# Altium PCB greento_PCB.PcbDoc
Units mm, origin at the board's own origin, x right, y up, seen from the top; angles counter-clockwise.
Board outline 152.49 x 82.5 mm, 2 copper layers (Top Layer, Bottom Layer), stack 1.671 mm thick; 45 components, 35 nets, 143 pads, 0 vias.
Unrouted connection lines stored in the file: 98.
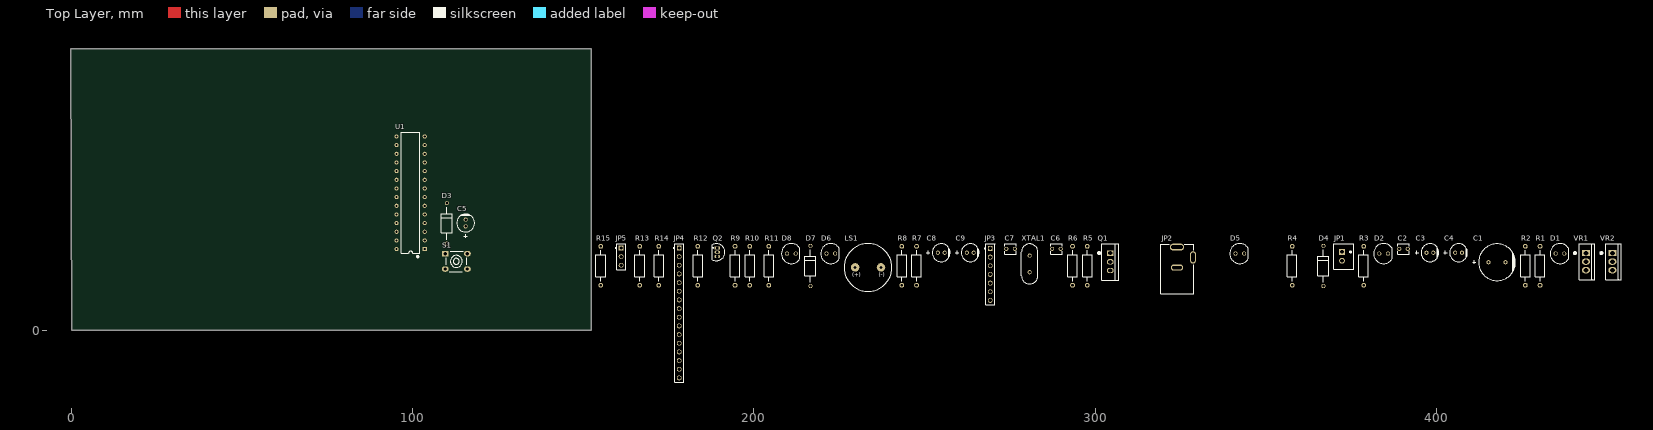
[diagram p0: Top Layer view]
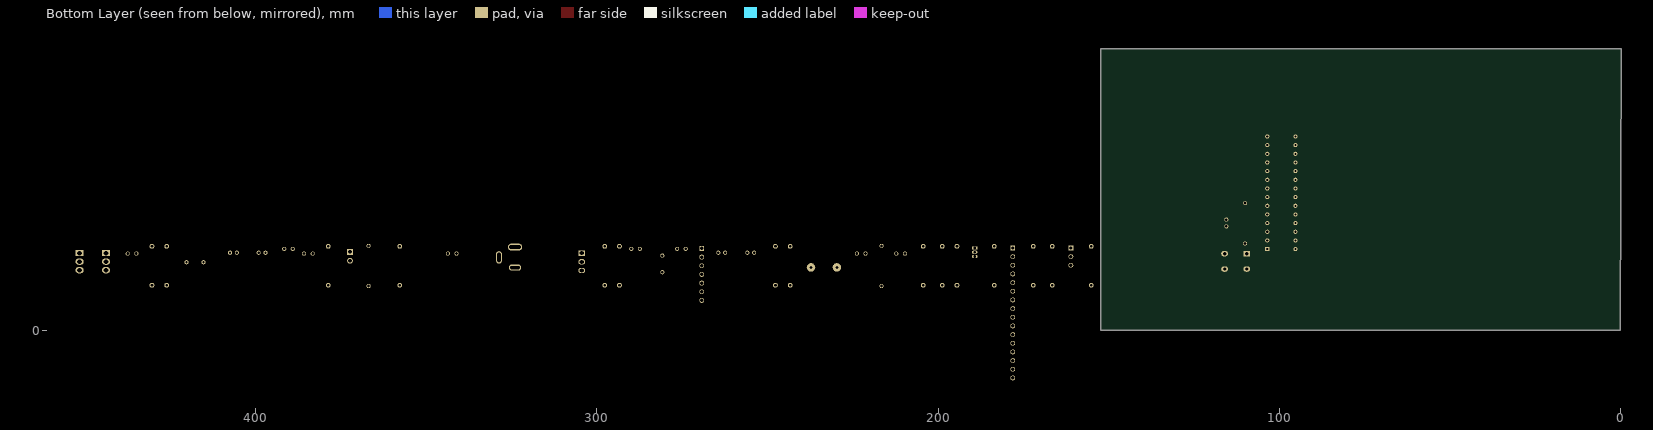
[diagram p1: Bottom Layer view, seen from below]

## Layer stack, top to bottom
Top Solder: solder mask 0.0102, Solder Resist, Dk 3.5
Top Layer: signal copper 0.0356
Dielectric 1: dielectric 1.6, FR-4, Dk 4.8
Bottom Layer: signal copper 0.0356
Bottom Solder: solder mask 0.0102, Solder Resist, Dk 3.5

## Board outline
0,0 152.3,0 152.3,82.5 -0.192,82.5

## Design rules (kind name [scope] priority, off if disabled: settings)
Clearance [All] p1: gap=0.3 ignorepadtopadclearanceinfootprint=FALSE
PolygonConnect [All] p1: connectstyle=Relief reliefconductorwidth=0.254 reliefentries=4 polygonreliefangle="90 Angle" airgapwidth=0.254
RoutingVias [All] p1: holewidth=0.3 width=0.6 viastyle="Through Hole" minholewidth=0.3 minwidth=0.6 maxholewidth=0.3 maxwidth=0.6
SilkToSolderMaskClearance [IsPad] p1: minsilkscreentomaskgap=0.1 clearancetoexposedcopper=TRUE
SolderMaskExpansion [All] p1: expansion=0.102 istentingtop=FALSE
Width [All] p1: maxlimit=1 minlimit=0.3 preferedwidth=0.5
29 further rules are at their usual default settings.

## Components (designator, comment, footprint, x,y, rotation, side; value= is the part's Value field where it differs from the comment)
C1 "CAP ALUM 10UF 20% 450V RADIAL" "CAP ALUM 10UF 20% 450V RADIAL" 415.317,19.984 r0 top
C2 "CAP CER 0.33UF 50V X7R RADIAL" "CAP CER 0.33UF 50V X7R RADIAL" 389.155,23.921 r0 top
C3 "CAP ALUM 0.1UF 20% 50V RADIAL" "CAP ALUM 0.1UF 20% 50V RADIAL" 397.156,22.778 r0 top
C4 "CAP ALUM 1UF 20% 100V RADIAL" "CAP ALUM 1UF 20% 100V RADIAL" 405.538,22.778 r0 top
C5 "CAP ALUM 0.1UF 20% 50V RADIAL" "CAP ALUM 0.1UF 20% 50V RADIAL" 115.5,30.5 r90 top
C6 "CAP CER 22PF 200V NP0 RADIAL" "CAP CER 22PF 200V NP0 RADIAL" 287.428,23.921 r0 top
C7 "CAP CER 22PF 200V NP0 RADIAL" "CAP CER 22PF 200V NP0 RADIAL" 273.966,23.921 r0 top
C8 "CAP ALUM 0.1UF 20% 50V RADIAL" "CAP ALUM 0.1UF 20% 50V RADIAL" 253.9,22.778 r0 top
C9 "CAP ALUM 0.1UF 20% 50V RADIAL" "CAP ALUM 0.1UF 20% 50V RADIAL" 262.409,22.778 r0 top
D1 "LED GREEN CLEAR T-1 3/4 T/H" "LED GREEN CLEAR T-1 3/4 T/H" 435.002,22.524 r0 top
D2 "LED GREEN CLEAR T-1 3/4 T/H" "LED GREEN CLEAR T-1 3/4 T/H" 383.313,22.524 r0 top
D3 "DIODE GEN PURP 50V 1A DO41" "Diode 1N001" 110,25.5 r90 top
D4 "DIODE GEN PURP 50V 1A DO41" "Diode 1N001" 366.93,12.999 r90 top
D5 "LED GREEN CLEAR T-1 3/4 T/H" "LED GREEN CLEAR T-1 3/4 T/H" 341.149,22.524 r0 top
D6 "LED GREEN CLEAR T-1 3/4 T/H" "LED GREEN CLEAR T-1 3/4 T/H" 221.261,22.524 r0 top
D7 "DIODE GEN PURP 50V 1A DO41" "Diode 1N001" 216.562,12.999 r90 top
D8 "LED RED DIFFUSED T-1 3/4 T/H" "RED GREEN CLEAR T-1 3/4 T/H" 209.704,22.524 r0 top
JP1 "CONN HEADER VERT 2POS 2.5MM" "CONN HEADER VERT 2POS 2.5MM" 372.391,23.032 r0 top
JP2 "PJ-002A" "CONN PWR JACK 2X5.5MM SOLDER" 324.004,24.429 r90 top
JP3 "CONN HEADER VERT 07POS 2.54MM" "HEADER MALE 7 PIN" 269.267,24.048 r0 top
JP4 "CONN HEADER VERT 16POS 2.54MM" "header male 16 pin" 178.081,24.175 r0 top
JP5 "CONN HEADER VERT 03POS 2.54MM" "HEADER MALE 3 PIN" 161.063,24.175 r0 top
LS1 "BUZZER PIEZO 5V 13.9MM TH" "BUZZER PIEZO 5V 13.9MM TH" 229.643,18.46 r0 top
Q1 "MOSFET N-CH 100V 33A TO220AB" IRF540NPBF 304.446,22.651 r0 top
Q2 "TRANS NPN 45V 0.1A TO92-3" BC547B 189.257,24.175 r0 top
R1 "RES 330 OHM 5% 1/2W AXIAL" "RES 330 OHM 5% 1/2W AXIAL" 430.43,13.253 r90 top
R2 "RES 10K OHM 5% 1/4W AXIAL" "RES 10K OHM 5% 1/4W AXIAL" 426.112,13.253 r90 top
R3 "RES 10K OHM 5% 1/4W AXIAL" "RES 10K OHM 5% 1/4W AXIAL" 378.741,13.253 r90 top
R4 "RES 10K OHM 5% 1/4W AXIAL" "RES 10K OHM 5% 1/4W AXIAL" 357.786,13.253 r90 top
R5 "RES 1K OHM 5% 1/4W AXIAL" "RES 1K OHM 5% 1/4W AXIAL" 297.715,13.253 r90 top
R6 "RES 10K OHM 5% 1/4W AXIAL" "RES 10K OHM 5% 1/4W AXIAL" 293.397,13.253 r90 top
R7 "RES 330 OHM 5% 1/2W AXIAL" "RES 330 OHM 5% 1/2W AXIAL" 247.677,13.253 r90 top
R8 "RES 330 OHM 5% 1/2W AXIAL" "RES 330 OHM 5% 1/2W AXIAL" 243.359,13.253 r90 top
R9 "RES 10K OHM 5% 1/4W AXIAL" "RES 10K OHM 5% 1/4W AXIAL" 194.464,13.253 r90 top
R10 "RES 10K OHM 5% 1/4W AXIAL" "RES 10K OHM 5% 1/4W AXIAL" 198.782,13.253 r90 top
R11 "RES 10K OHM 5% 1/4W AXIAL" "RES 10K OHM 5% 1/4W AXIAL" 204.37,13.253 r90 top
R12 "RES 1K OHM 5% 1/4W AXIAL" "RES 1K OHM 5% 1/4W AXIAL" 183.542,13.253 r90 top
R13 "RES 10K OHM 5% 1/4W AXIAL" "RES 10K OHM 5% 1/4W AXIAL" 166.524,13.253 r90 top
R14 "RES 330 OHM 5% 1/2W AXIAL" "RES 330 OHM 5% 1/2W AXIAL" 172.112,13.253 r90 top
R15 "RES 10K OHM 5% 1/4W AXIAL" "RES 10K OHM 5% 1/4W AXIAL" 155.094,13.253 r90 top
S1 "SWITCH TACTILE SPST-NO 0.05A 12V" "Tacktile switch" 109.5,22.5 r0 top
U1 "AVR series Microcontroller IC 8-Bit 20MHz 32KB (16K x 16) FLASH 28-PDIP" ATMEGA328P 103.5,23.84 r180 top
VR1 "LM7805CT" lm7805 443.892,22.651 r0 top
VR2 "LM7805CT" lm7805 451.639,22.651 r0 top
XTAL1 "CRYSTAL 16.0000MHZ 20PF TH" "CRYSTAL 16.0000MHZ 20PF TH" 280.824,17.063 r90 top

## Footprints (in the part's own frame and the unit in brackets; to place one, negate y for a bottom-side part, rotate by r counter-clockwise, add the part's x,y. Pads: shape width x height; smd on the part's side, far side on the other; paste and mask are expansions set on the pad)
ATMEGA328P [mm]
  rect 1.2x1.2 hole 0.6: 1(0,0)
  round 1.2 hole 0.6: 2(0,-2.54) 3(0,-5.08) 4(0,-7.62) 5(0,-10.16) 6(0,-12.7) 7(0,-15.24) 8(0,-17.78) 9(0,-20.32) 10(0,-22.86) 11(0,-25.4) 12(0,-27.94) 13(0,-30.48) 14(0,-33.02) 15(8.255,-33.02) 16(8.255,-30.48) 17(8.255,-27.94) 18(8.255,-25.4) 19(8.255,-22.86) 20(8.255,-20.32) 21(8.255,-17.78) 22(8.255,-15.24) 23(8.255,-12.7) 24(8.255,-10.16) 25(8.255,-7.62) 26(8.255,-5.08) 27(8.255,-2.54) 28(8.255,0)
  silkscreen extent 1.43,-34.29 6.82,2.48, body extent 0.2,-33.9 8.1,0.78, height 4.08
BC547B [mm]
  rect 1.6x0.9 hole 0.8: 1(0,0)
  oval 1.6x0.9 hole 0.8: 2(0,-1.25) 3(0,-2.5)
  silkscreen extent -1.53,-3.7 2.25,1.2, body extent -1.42,-3.6 2.2,1.15, height 5.43
"BUZZER PIEZO 5V 13.9MM TH" [mm]
  round 2.5 hole 0.9: 1(0,0) 2(7.6,0)
  silkscreen extent -3.2,-7 10.8,7, body extent -3.15,-6.95 10.75,6.95, height 7.6
"CAP ALUM 0.1UF 20% 50V RADIAL" [mm]
  round 1.2 hole 0.7: 1(0,0) 2(2,0)
  silkscreen extent -3.34,-2.62 3.62,2.62, body extent -1.59,-2.55 3.62,2.62, height 12.61
"CAP ALUM 1UF 20% 100V RADIAL" [mm]
  round 1.2 hole 0.7: 1(0,0) 2(2,0)
  silkscreen extent -3.34,-2.62 3.62,2.62, body extent -1.59,-2.55 3.62,2.62, height 12.61
"CAP ALUM 10UF 20% 450V RADIAL" [mm]
  round 1.2 hole 0.7: 1(0,0) 2(5,0)
  silkscreen extent -4.68,-5.4 7.9,5.4, body extent -2.75,-5.25 7.77,5.25, height 22.11
"CAP CER 0.33UF 50V X7R RADIAL" [mm]
  round 1.2 hole 0.7: 1(0,0) 2(2.5,0)
  silkscreen extent -0.48,-1.55 2.98,1.55, body extent -0.29,-1.04 2.79,1.04, height 5.3
"CAP CER 22PF 200V NP0 RADIAL" [mm]
  round 1.2 hole 0.7: 1(0,0) 2(2.5,0)
  silkscreen extent -0.48,-1.55 2.98,1.55, body extent -0.29,-1.04 2.79,1.04, height 5.3
"CONN HEADER VERT 2POS 2.5MM" [mm]
  rect 1.7x1.7 hole 1.1: 1(0,0)
  round 1.7 hole 1.1: 2(0,-2.6)
  silkscreen extent -2.37,-5.05 3.47,2.42, body extent -2.33,-5 3.42,2.4, height 7.01
"CONN PWR JACK 2X5.5MM SOLDER" [mm]
  oval 2x4.2 hole 1 slot 3.4 at 90 deg: 1(0,0)
  oval 1.8x3.6 hole 0.9 slot 2.8 at 90 deg: 2(-6,0)
  oval 3.6x1.8 hole 0.9 slot 2.8 at 0 deg: 3(-3,-4.7)
  silkscreen extent -13.7,-4.97 0.85,4.7, body extent -13.7,-4.83 0.7,4.57, height 11.1
"CRYSTAL 16.0000MHZ 20PF TH" [mm]
  round 1.2 hole 0.7: 1(0,0) 2(4.88,0)
  silkscreen extent -3.42,-2.4 8.3,2.4, body extent -2.99,-2.25 7.87,2.25, height 3.69
"Diode 1N001" [mm]
  round 1.2 hole 0.9: A(0,0) K(11.8,0)
  silkscreen extent 1.13,-1.6 10.68,1.6, body extent -0.4,-1.48 12.29,1.48, height 3.4
"HEADER MALE 3 PIN" [mm]
  rect 1.4x1.4 hole 1: 1(0,0)
  round 1.4 hole 1: 2(0,-2.54) 3(0,-5.08)
  silkscreen extent -1.77,-6.43 1.3,1.28, body extent -1.27,-6.37 1.27,1.25, height 8.35
"HEADER MALE 7 PIN" [mm]
  rect 1.4x1.4 hole 1: 1(0,0)
  round 1.4 hole 1: 2(0,-2.54) 3(0,-5.08) 4(0,-7.62) 5(0,-10.16) 6(0,-12.7) 7(0,-15.24)
  silkscreen extent -1.77,-16.58 1.3,1.33, body extent -1.27,-16.53 1.27,1.25, height 8.49
"header male 16 pin" [mm]
  rect 1.4x1.4 hole 1: 1(0,0)
  round 1.4 hole 1: 2(0,-2.54) 3(0,-5.08) 4(0,-7.62) 5(0,-10.16) 6(0,-12.7) 7(0,-15.24) 8(0,-17.78) 9(0,-20.32) 10(0,-22.86) 11(0,-25.4) 12(0,-27.94) 13(0,-30.48) 14(0,-33.02) 15(0,-35.56) 16(0,-38.1)
  silkscreen extent -1.77,-39.4 1.28,1.28, body extent -1.27,-39.39 1.27,1.25, height 8.49
IRF540NPBF [mm]
  rect 2x1.6 hole 1.2: 1(0,0)
  oval 2x1.6 hole 1.2: 2(0,-2.54) 3(0,-5.08)
  silkscreen extent -3.55,-7.98 2.47,2.8, body extent -2.32,-7.85 2.38,2.69, height 15.75
"LED GREEN CLEAR T-1 3/4 T/H" [mm]
  round 1.2 hole 0.8: A(0,0) K(2.54,0)
  silkscreen extent -1.65,-2.92 3.77,2.92, body extent -1.66,-2.93 3.77,2.93, height 8.61
lm7805 [mm]
  rect 2.4x1.8 hole 1.4: 1(0,0)
  oval 2.4x1.8 hole 1.4: 2(0,-2.5) 3(0,-5)
  silkscreen extent -3.55,-7.75 2.52,2.8, body extent -1.78,-7.61 2.4,2.67, height 20.75
"RED GREEN CLEAR T-1 3/4 T/H" [mm]
  round 1.2 hole 0.8: A(0,0) K(2.54,0)
  silkscreen extent -1.65,-2.92 3.77,2.92, body extent -1.66,-2.93 3.77,2.93, height 8.61
"RES 1K OHM 5% 1/4W AXIAL" [mm]
  round 1.4 hole 0.8: 1(0,0) 2(11.4,0)
  silkscreen extent 1.2,-1.4 10.2,1.4, body extent -0.32,-1.31 11.75,1.31, height 2.61
"RES 10K OHM 5% 1/4W AXIAL" [mm]
  round 1.4 hole 0.8: 1(0,0) 2(11.4,0)
  silkscreen extent 1.2,-1.4 10.2,1.4, body extent -0.32,-1.31 11.75,1.31, height 2.61
"RES 330 OHM 5% 1/2W AXIAL" [mm]
  round 1.4 hole 0.8: 1(0,0) 2(11.4,0)
  silkscreen extent 1.2,-1.4 10.2,1.4, body extent -0.32,-1.31 11.75,1.31, height 2.61
"Tacktile switch" [mm]
  rect 2x1.6 hole 1: 1(0,0)
  oval 2x1.6 hole 1: 2(6.5,0) 3(0,-4.5) 4(6.5,-4.5)
  silkscreen extent 0.25,-5.25 6.25,0.75, body extent -0.7,-5.25 7.2,0.75, height 9.51

## Part data
C1: library part 450BXC10MEFC10X20, "BXC Series 450 V 10 µF 10x20mm Aluminum Electrolytic Capacitor", Capacitance=10uF, Case/Package=Radial, Dielectric Material=Aluminium, Manufacturer=Rubycon, Max Operating Temperature=105°C, Min Operating Temperature=-25°C, Package Quantity=1000, Ripple Current=99mA, Supplier Part Number 1="10 uF", Tolerance=20%, Voltage=450V, Category="Aluminum Electrolytic Capacitors", ComponentLink1Description=https://datasheet.ciiva.com/11780/0900766b80f2a138-11780805.pdf?src-supplier=RSComponents, ComponentLink1URL=https://datasheet.ciiva.com/11780/0900766b80f2a138-11780805.pdf?src-supplier=RSComponents, ComponentLink2Description=https://datasheet.ciiva.com/1456/610966-1456385.pdf?src-supplier=Element14, ComponentLink2URL=https://datasheet.ciiva.com/1456/610966-1456385.pdf?src-supplier=Element14, Diameter=10mm, Height=20mm, Height - Seated (Max)=0.866inch, Lead Free="Lead Free", Lead Pitch=5mm, Life (Hours)=10000Hour, Manufacturer Part Number=450BXC10MEFC10X20, Mount="Through Hole", Packaging=Bulk, Pricing 1="1=0.77000, 10=0.54700, 50=0.41380, 100=0.36030, 500=0.26692, 1000=0.22688, 2500=0.21353, 5000=0.20019 (USD)", Radiation Hardening=No, REACH SVHC=Unknown, RoHS=Yes, RoHS Compliant=Yes, Series=BXC, Stock 1=68178, Supplier 1=Digi-Key, Termination=Radial, Voltage Rating=450V, Voltage Rating (DC)=450V
C2: library part FK24X7R1H334K, "Cap Ceramic 0.33uF 50V X7R 10% Radial 5mm 125C Bulk", Capacitance=330nF, Case/Package=Radial, Dielectric=X7R, Manufacturer=TDK, Max Operating Temperature=125°C, Min Operating Temperature=-55°C, Package Quantity=500, Supplier Part Number 1=0.33uF, Tolerance=10%, Voltage Rating=50V, Category="Ceramic Capacitors", ComponentLink1Description=https://datasheet.ciiva.com/5388/tdk-lowvoltageleadmlcc-commercial-general-en-347111-5388967.pdf?src-supplier=Mouser, ComponentLink1URL=https://datasheet.ciiva.com/5388/tdk-lowvoltageleadmlcc-commercial-general-en-347111-5388967.pdf?src-supplier=Mouser, ComponentLink2Description=https://datasheet.ciiva.com/142/leadmlcc-commercial-general-en-142555.pdf?src-supplier=Digi-Key, ComponentLink2URL=https://datasheet.ciiva.com/142/leadmlcc-commercial-general-en-142555.pdf?src-supplier=Digi-Key, ComponentLink3Description=https://datasheet.ciiva.com/11590/e4941-fk-11590557.pdf?src-supplier=Avnet, ComponentLink3URL=https://datasheet.ciiva.com/11590/e4941-fk-11590557.pdf?src-supplier=Avnet, Height=2.5mm, Height - Seated (Max)=0.217inch, Lead Diameter=0.5mm, Lead Free="Lead Free", Lead Pitch=5mm, Lead/Base Style=Kinked, Length=0.217inch, Manufacturer Part Number=FK24X7R1H334K, Mount="Through Hole", Packaging=Bulk, Pricing 1="1=0.35000, 10=0.24500, 50=0.17140, 100=0.14680, 500=0.11014, 1000=0.09300, 2500=0.08811, 5000=0.08322 (USD)", Radiation Hardening=No, RoHS=Yes, RoHS Compliant=Yes, Series=FK, Stock 1=6787, Supplier 1=Digi-Key, Termination=Radial, Voltage Rating (DC)=50V, Width=4.5mm
C3 C5 C8 C9: library part UVZ1H0R1MDD1TD, "NICHICON         UVZ1H0R1MDD1TD             ALUMINUM ELECTROLYTIC CAPACITOR, 0.1UF, 50V, 20%, RADIAL", Capacitance=100nF, Case/Package=Radial, Dielectric Material=Aluminium, Manufacturer=Nichicon, Max Operating Temperature=105°C, Min Operating Temperature=-55°C, Package Quantity=2000, Ripple Current=1.3mA, Supplier Part Number 1=0.1uF, Tolerance=20%, Voltage Rating=50V, Category="Aluminum Electrolytic Capacitors", ComponentLink1Description=https://datasheet.ciiva.com/7336/e-vz-7336149.pdf?src-supplier=Newark, ComponentLink1URL=https://datasheet.ciiva.com/7336/e-vz-7336149.pdf?src-supplier=Newark, ComponentLink2Description=https://datasheet.ciiva.com/29550/e-vz-29550229.pdf?src-supplier=Digi-Key, ComponentLink2URL=https://datasheet.ciiva.com/29550/e-vz-29550229.pdf?src-supplier=Digi-Key, ComponentLink3Description=https://datasheet.ciiva.com/22749/1909357-22749707.pdf?src-supplier=Element14, ComponentLink3URL=https://datasheet.ciiva.com/22749/1909357-22749707.pdf?src-supplier=Element14, ComponentLink4Description=https://datasheet.ciiva.com/7781/e-vz-7781773.pdf?src-supplier=Element14, ComponentLink4URL=https://datasheet.ciiva.com/7781/e-vz-7781773.pdf?src-supplier=Element14, Diameter=5mm, Height=11mm, Height - Seated (Max)=0.492inch, Lead Pitch=0.079inch, Lead/Base Style=Straight, Life (Hours)=1000Hour, Manufacturer Part Number=UVZ1H0R1MDD1TD, Mount="Through Hole", Number of Pins=2, Packaging="Tape and Reel", Pricing 1="1=0.31000, 10=0.21400, 50=0.14260, 100=0.12120, 500=0.08556, 1000=0.07486 (USD)", REACH SVHC="No SVHC", RoHS=Yes, RoHS Compliant=Yes, Series=VZ, Stock 1=9888, Supplier 1=Digi-Key, Termination=Radial, Voltage Rating (DC)=50V
C4: library part UVR2A010MDD1TD, "Cap Aluminum 1uF 100V 20% (5 X 11mm) Radial 2.5mm 21mA 2000 hr 85°C Ammo Pack", Capacitance=1uF, Case/Package=Radial, Dielectric Material=Aluminium, Leakage Current=4uA, Manufacturer=Nichicon, Max Operating Temperature=85°C, Min Operating Temperature=-40°C, Package Quantity=2000, Ripple Current=21mA, Tolerance=20%, Voltage=100V, Category="Aluminum Electrolytic Capacitors", ComponentLink1Description=https://datasheet.ciiva.com/11688/e-vr-11688357.pdf?src-supplier=Avnet, ComponentLink1URL=https://datasheet.ciiva.com/11688/e-vr-11688357.pdf?src-supplier=Avnet, ComponentLink2Description=https://datasheet.ciiva.com/29550/e-vr-29550405.pdf?src-supplier=Digi-Key, ComponentLink2URL=https://datasheet.ciiva.com/29550/e-vr-29550405.pdf?src-supplier=Digi-Key, ComponentLink3Description=https://datasheet.ciiva.com/7907/e-vr-7907511.pdf?src-supplier=Element14, ComponentLink3URL=https://datasheet.ciiva.com/7907/e-vr-7907511.pdf?src-supplier=Element14, ComponentLink4Description=https://datasheet.ciiva.com/5330/e-vr-6088-5330601.pdf?src-supplier=Mouser, ComponentLink4URL=https://datasheet.ciiva.com/5330/e-vr-6088-5330601.pdf?src-supplier=Mouser, ComponentLink5Description=https://datasheet.ciiva.com/16392/e-vr-16392922.pdf?src-supplier=Future+Electronics, ComponentLink5URL=https://datasheet.ciiva.com/16392/e-vr-16392922.pdf?src-supplier=Future+Electronics, ComponentLink6Description=https://datasheet.ciiva.com/14599/70187464-14599886.pdf?src-supplier=Allied+Electronics, ComponentLink6URL=https://datasheet.ciiva.com/14599/70187464-14599886.pdf?src-supplier=Allied+Electronics, Construction=RADIAL, Diameter=5mm, Dissipation Factor=0.08%, Height=11mm, Height - Seated (Max)=0.492inch, Lead Diameter=0.5mm, Lead Free="Lead Free", Lead Pitch=2mm, Length=11mm, Life (Hours)=2000Hour, Manufacturer Part Number=UVR2A010MDD1TD, Mount="Through Hole,PCB", Number of Pins=2, Packaging="Tape and Reel", Pricing 1="1=0.30000, 10=0.20600, 50=0.13700, 100=0.11650, 500=0.08224, 1000=0.07197 (USD)", Radiation Hardening=No, REACH SVHC="No SVHC", RoHS=Yes, RoHS Compliant=Yes, Series=VR, Stock 1=11511, Supplier 1=Digi-Key, Supplier Part Number 1=1uF, Termination=Radial, Voltage Rating=100V, Voltage Rating (DC)=100V
C6 C7: library part C317C220J2G5TA, "Cap Ceramic 22pF 200V C0G 5% Radial 5.08mm 125°C Extreme Low ESR Bulk", Capacitance=22pF, Case/Package=Radial, Dielectric=C0G, Dielectric Material=Ceramic, Manufacturer=KEMET, Max Operating Temperature=125°C, Min Operating Temperature=-55°C, Package Quantity=500, Temperature Coefficient=30ppm/°C, Tolerance=5%, Voltage=200V, Category="Ceramic Capacitors", ComponentLink1Description=https://datasheet.ciiva.com/14588/70095037-14588379.pdf?src-supplier=Allied+Electronics, ComponentLink1URL=https://datasheet.ciiva.com/14588/70095037-14588379.pdf?src-supplier=Allied+Electronics, ComponentLink2Description=https://datasheet.ciiva.com/6178/f3101-goldmax-6178014.pdf?src-supplier=Farnell, ComponentLink2URL=https://datasheet.ciiva.com/6178/f3101-goldmax-6178014.pdf?src-supplier=Farnell, Construction=RADIAL, Depth=2.54mm, Dissipation Factor=0.1%, Height=2.54mm, Height - Seated (Max)=0.23inch, Lead Diameter=0.51mm, Lead Free="Lead Free", Lead Length=7mm, Lead Pitch=5.08mm, Lead/Base Style="Formed Leads", Length=3.81mm, Manufacturer Part Number=C317C220J2G5TA, Mount="Through Hole,PCB", Number of Pins=2, Packaging=Bulk, Pricing 1="1=0.20000, 10=0.13900, 50=0.08320, 100=0.07020, 500=0.04804, 1000=0.04250, 2500=0.04066, 5000=0.03696 (USD)", Radiation Hardening=No, REACH SVHC="No SVHC", RoHS=Yes, RoHS Compliant=Yes, Series="Golden Max™", Stock 1=33492, Supplier 1=Digi-Key, Supplier Part Number 1=22pF, Termination=Radial, Voltage Rating=200V, Voltage Rating (DC)=200V, Width=3.81mm
D1 D2 D5 D6: library part LTL-307GE, "Green 5 mm T-13/4 40° Diffused 29 mcd 2.1 V LED Through Hole", Case/Package=Radial, Color=Green, Forward Current=30mA, Forward Voltage=2.1V, Manufacturer="Vishay Lite-On", Max Operating Temperature=100°C, Min Operating Temperature=-55°C, Package Quantity=1000, Power Dissipation=100mW, Reverse Voltage=5V, Supplier Part Number 1=GREEN, Test Current=10mA, Category=LEDs, ComponentLink1Description=https://datasheet.ciiva.com/2112/ltl-307ge-2112299.pdf?src-supplier=Digi-Key, ComponentLink1URL=https://datasheet.ciiva.com/2112/ltl-307ge-2112299.pdf?src-supplier=Digi-Key, ComponentLink2Description=https://datasheet.ciiva.com/4692/100-307ge-41558-4692669.pdf?src-supplier=Mouser, ComponentLink2URL=https://datasheet.ciiva.com/4692/100-307ge-41558-4692669.pdf?src-supplier=Mouser, ComponentLink3Description=https://datasheet.ciiva.com/16216/ltl-307ge-16216217.pdf?src-supplier=Future+Electronics, ComponentLink3URL=https://datasheet.ciiva.com/16216/ltl-307ge-16216217.pdf?src-supplier=Future+Electronics, ComponentLink4Description=https://datasheet.ciiva.com/15118/getdatasheetpartid-214534-15118092.pdf?src-supplier=Verical, ComponentLink4URL=https://datasheet.ciiva.com/15118/getdatasheetpartid-214534-15118092.pdf?src-supplier=Verical, ComponentLink5Description=https://datasheet.ciiva.com/19482/790217-19482316.pdf?src-supplier=Jameco, ComponentLink5URL=https://datasheet.ciiva.com/19482/790217-19482316.pdf?src-supplier=Jameco, Depth=5.85mm, Diameter=5mm, Dominant Wavelength=569nm, Height=8.6mm, Illumination Color=Green, Lead Free="Lead Free", Length=5.85mm, Lens Color=Green, Lens Style=Dome,Diffused,Colored,Circular, Lens Transparency=Clear, Luminous Intensity=60mcd, Manufacturer Part Number=LTL-307GE, Mount="Through Hole", Number of Elements=1, Number of LEDs=1, Number of Pins=2, Packaging=Bulk, Pricing 1="1=0.36000, 10=0.19300, 100=0.08970, 500=0.08280, 1000=0.06486, 2000=0.06348, 5000=0.05520, 10000=0.04968, 25000=0.04416 (USD)", Radiation Hardening=No, RoHS=Yes, RoHS Compliant=Yes, Series=-, Stock 1=33535, Supplier 1=Digi-Key, Viewing Angle=40°, Wavelength=565nm
D3 D4 D7: library part 1N4001G, "Diode Switching 50V 1A 2-Pin DO-41 Bag", Average Rectified Current=1A, Case/Package=DO-41, Forward Voltage=1.1V, Manufacturer="ON Semiconductor", Max Forward Surge Current (Ifsm)=30A, Max Operating Temperature=175°C, Max Repetitive Reverse Voltage (Vrrm)=50V, Max Reverse Current=10uA, Min Operating Temperature=-65°C, Package Quantity=1000, Supplier Part Number 1=1N4001, Category="Rectifier Diodes", ComponentLink1Description=https://datasheet.ciiva.com/30479/0900766b811a6370-30479403.pdf?src-supplier=RSComponents, ComponentLink1URL=https://datasheet.ciiva.com/30479/0900766b811a6370-30479403.pdf?src-supplier=RSComponents, ComponentLink2Description=https://datasheet.ciiva.com/3304/1n4001-d-3304181.pdf?src-supplier=Avnet, ComponentLink2URL=https://datasheet.ciiva.com/3304/1n4001-d-3304181.pdf?src-supplier=Avnet, ComponentLink3Description=https://datasheet.ciiva.com/916/1n4001-d-916308.pdf?src-supplier=Digi-Key, ComponentLink3URL=https://datasheet.ciiva.com/916/1n4001-d-916308.pdf?src-supplier=Digi-Key, Contact Plating=Tin,Matte, Current Rating=1A, Diameter=2.7mm, Element Configuration=Single, Forward Current=1A, Halogen Free="Halogen Free", Height=5.2mm, Lead Free="Lead Free", Length=0.204inch, Manufacturer Part Number=1N4001G, Max Reverse Voltage (DC)=50V, Max Surge Current=30A, Number of Pins=2, Output Current=1A, Packaging=Bulk, Peak Non-Repetitive Surge Current=30A, Polarity=Standard, Pricing 1="1=0.32000, 10=0.26400, 100=0.14020, 500=0.09222, 1000=0.06271, 2000=0.05656, 5000=0.04918, 10000=0.04181, 50000=0.04060 (USD)", Radiation Hardening=No, REACH SVHC="No SVHC", Reverse Voltage=50V, RoHS=Yes, RoHS Compliant=Yes, Series=-, Supplier 1=Digi-Key, Voltage Rating (DC)=50V, Weight=0.01lb, Width=0.25inch
D8: library part LTL-307P, "Red 5 mm 50° Tinted Diffused 5.6 mcd 2.1 V LED Through Hole", Case/Package=Radial, Color=Red, Forward Current=15mA, Forward Voltage=2.1V, Manufacturer="Vishay Lite-On", Max Operating Temperature=100°C, Max Power Dissipation=40mW, Min Operating Temperature=-55°C, Operating Wavelength-Nom=657nm, Package Quantity=1000, Reverse Voltage=5V, Supplier Part Number 1=RED, Test Current=10mA, Category=LEDs, ComponentLink1Description=https://datasheet.ciiva.com/2112/ltl-307p-2112293.pdf?src-supplier=Digi-Key, ComponentLink1URL=https://datasheet.ciiva.com/2112/ltl-307p-2112293.pdf?src-supplier=Digi-Key, ComponentLink2Description=https://datasheet.ciiva.com/4692/100-307p-13516-4692492.pdf?src-supplier=Mouser, ComponentLink2URL=https://datasheet.ciiva.com/4692/100-307p-13516-4692492.pdf?src-supplier=Mouser, ComponentLink3Description=https://datasheet.ciiva.com/15117/getdatasheetpartid-187741-15117983.pdf?src-supplier=Verical, ComponentLink3URL=https://datasheet.ciiva.com/15117/getdatasheetpartid-187741-15117983.pdf?src-supplier=Verical, ComponentLink4Description=https://datasheet.ciiva.com/16331/lite-onltl-307p-16331293.pdf?src-supplier=Future+Electronics, ComponentLink4URL=https://datasheet.ciiva.com/16331/lite-onltl-307p-16331293.pdf?src-supplier=Future+Electronics, Depth=5.85mm, Diameter=5mm, Dominant Wavelength=657nm, Height=8.6mm, Illumination Color=Red, Lead Free="Lead Free", Length=5.85mm, Lens Color=Red, Lens Style=Dome,Diffused,Colored,Circular,Tinted, Lens Transparency=Diffused, Luminous Intensity=5.6mcd, Manufacturer Part Number=LTL-307P, Mount="Through Hole", Number of Elements=1, Number of LEDs=1, Number of Pins=2, Packaging=Bulk, Power Dissipation=40mW, Pricing 1="1=0.36000, 10=0.19300, 100=0.08970, 500=0.08280, 1000=0.06486, 2000=0.06348, 5000=0.05520, 10000=0.04968, 25000=0.04416 (USD)", Radiation Hardening=No, RoHS=Yes, RoHS Compliant=Yes, Series=-, Stock 1=11954, Supplier 1=Digi-Key, Viewing Angle=50°, Wavelength=657nm, Width=5.85mm
JP1: library part B2B-XH-A(LF)(SN), "Conn Shrouded Header (4 Sides) HDR 2 POS 2.5mm Solder ST Thru-Hole Box", Manufacturer=JST, Supplier Part Number 1=JST-2PIN, Category="Headers and Wire Housings", ComponentLink1Description=https://datasheet.ciiva.com/11746/0900766b8082653e-11746979.pdf?src-supplier=RSComponents, ComponentLink1URL=https://datasheet.ciiva.com/11746/0900766b8082653e-11746979.pdf?src-supplier=RSComponents, ComponentLink2Description=https://datasheet.ciiva.com/26894/getdatasheetpartid-640357-26894434.pdf?src-supplier=Verical, ComponentLink2URL=https://datasheet.ciiva.com/26894/getdatasheetpartid-640357-26894434.pdf?src-supplier=Verical, ComponentLink3Description=https://datasheet.ciiva.com/26894/getdatasheetpartid-385291-26894760.pdf?src-supplier=Verical, ComponentLink3URL=https://datasheet.ciiva.com/26894/getdatasheetpartid-385291-26894760.pdf?src-supplier=Verical, ComponentLink4Description=https://datasheet.ciiva.com/8052/5448-8052024.pdf?src-supplier=Element14, ComponentLink4URL=https://datasheet.ciiva.com/8052/5448-8052024.pdf?src-supplier=Element14, Manufacturer Part Number=B2B-XH-A(LF)(SN), Pricing 1="1=0.15000, 10=0.11800, 100=0.08680, 500=0.07182, 1000=0.06284, 5000=0.05386, 10000=0.05237 (USD)", RoHS=Yes, Supplier 1=Digi-Key
JP2: "2.0 x 6.5 mm, 2.5 A, Horizontal, Through Hole, Dc Power Jack Connector", Color=Black, Current Rating=2.5A, Flammability Rating="UL94 V-0", Insulation Resistance=50MR, Manufacturer=CUI, Max Operating Temperature=85°C, Min Operating Temperature=-25°C, Package Quantity=500, Supplier Part Number 1="12V JACK", Voltage Rating=24V, Category=Connectors, ComponentLink1Description=http://www.mouser.com/ds/2/670/pj-002a-515880.pdf?src-supplier=Mouser, ComponentLink1URL=http://www.mouser.com/ds/2/670/pj-002a-515880.pdf?src-supplier=Mouser, ComponentLink2Description=http://www.cui.com/Product/Resource/FuturePDF/PJ-002A.pdf?src-supplier=Future+Electronics, ComponentLink2URL=http://www.cui.com/Product/Resource/FuturePDF/PJ-002A.pdf?src-supplier=Future+Electronics, ComponentLink3Description=https://www.cui.com/product/resource/digikeypdf/pj-002a.pdf?src-supplier=Digi-Key, ComponentLink3URL=https://www.cui.com/product/resource/digikeypdf/pj-002a.pdf?src-supplier=Digi-Key, Connector Type=Jack, Contact Gender=Male, Contact Material="Copper Alloy,Copper", Contact Plating=Tin,Nickel, Diameter=2.1mm, Gender=Male, Housing Color=Black, Housing Material=Thermoplastic, Lead Free="Lead Free", Manufacturer Part Number=PJ-002A, Mount="Through Hole", Number of Conductors=2, Orientation=Horizontal, Packaging=Bulk, RoHS=Yes, RoHS Compliant=Yes, Series=-, Shielding=Unshielded, Supplier 1=Digi-Key, Termination="Through Hole"
JP3: library part PRPC007SACN-RC, "07 Position Through-Hole Single Row Straight .100 Header", Color=Black, Manufacturer=Sullins, Manufacturer Part Number=PRPC040SACN-RC, Package Quantity=1, Supplier Part Number 1=HEADER-MALE-7PINS, Category=Connectors, ComponentLink1Description=https://datasheet.ciiva.com/741/xrxczzzsxxn-rc-st-11635-b-741925.pdf?src-supplier=Digi-Key, ComponentLink1URL=https://datasheet.ciiva.com/741/xrxczzzsxxn-rc-st-11635-b-741925.pdf?src-supplier=Digi-Key, Connector Type="Male Pin", Contact Mating Length=0.23inch, Contact Plating=Gold, Contact Type="Male Pin", Lead Free="Lead Free", Mount="Through Hole", Number of Positions=40, Number of Rows=1, Packaging=Bulk, Pitch=0.1inch, Pricing 1="1=0.90000, 10=0.80100, 100=0.65960, 500=0.52140, 1000=0.45370 (USD)", RoHS=Yes, RoHS Compliant=Yes, Stock 1=10402, Supplier 1=Digi-Key, Termination=Solder
JP4: library part PRPC016SACN-RC, "16 Position Through-Hole Single Row Straight .100 Header", Color=Black, Manufacturer=Sullins, Manufacturer Part Number=PRPC040SACN-RC, Package Quantity=1, Supplier Part Number 1=HEADER-MALE-16PINS, Category=Connectors, ComponentLink1Description=https://datasheet.ciiva.com/741/xrxczzzsxxn-rc-st-11635-b-741925.pdf?src-supplier=Digi-Key, ComponentLink1URL=https://datasheet.ciiva.com/741/xrxczzzsxxn-rc-st-11635-b-741925.pdf?src-supplier=Digi-Key, Connector Type="Male Pin", Contact Mating Length=0.23inch, Contact Plating=Gold, Contact Type="Male Pin", Lead Free="Lead Free", Mount="Through Hole", Number of Positions=40, Number of Rows=1, Packaging=Bulk, Pitch=0.1inch, Pricing 1="1=0.90000, 10=0.80100, 100=0.65960, 500=0.52140, 1000=0.45370 (USD)", RoHS=Yes, RoHS Compliant=Yes, Stock 1=10402, Supplier 1=Digi-Key, Termination=Solder
JP5: library part PRPC040SACN-RC, "03 Position Through-Hole Single Row Straight .100 Header", Color=Black, Manufacturer=Sullins, Package Quantity=1, Supplier Part Number 1=HEADER_MALE_3PINS, Category=Connectors, ComponentLink1Description=https://datasheet.ciiva.com/741/xrxczzzsxxn-rc-st-11635-b-741925.pdf?src-supplier=Digi-Key, ComponentLink1URL=https://datasheet.ciiva.com/741/xrxczzzsxxn-rc-st-11635-b-741925.pdf?src-supplier=Digi-Key, Connector Type="Male Pin", Contact Mating Length=0.23inch, Contact Plating=Gold, Contact Type="Male Pin", Lead Free="Lead Free", Manufacturer Part Number=PRPC040SACN-RC, Mount="Through Hole", Number of Positions=40, Number of Rows=1, Packaging=Bulk, Pitch=0.1inch, Pricing 1="1=0.90000, 10=0.80100, 100=0.65960, 500=0.52140, 1000=0.45370 (USD)", RoHS=Yes, RoHS Compliant=Yes, Stock 1=10402, Supplier 1=Digi-Key, Termination=Solder
LS1: library part CPI-137-83T, "13.9 mm, 5 Vdc, 83 dB, Through Hole, Driving Circuit, Piezo Audio Indicator Buzzer", Manufacturer=CUI, Supplier Part Number 1=BUZZER, Manufacturer Part Number=CPI-137-83T, RoHS=No, Supplier 1=Digi-Key
Q1: library part IRF540NPBF, "Mosfet, Power; N-ch; Vdss 100V; Rds(on) 44MILLIOHMS; Id 33A; TO-220AB; Pd 130W; -55DEG", Case/Package=TO-220AB, Continuous Drain Current (ID)=33A, Current Rating=27A, Drain to Source Breakdown Voltage=100V, Drain to Source Resistance=44mR, Drain-source On Resistance-Max=44MR, Gate to Source Voltage (Vgs)=20V, Input Capacitance=1.96nF, Manufacturer="International Rectifier", Max Operating Temperature=175°C, Max Power Dissipation=130W, Min Operating Temperature=-55°C, Package Quantity=50, Threshold Voltage=4V, Category=MOSFETs, ComponentLink1Description=https://datasheet.ciiva.com/7271/irf540n-7271923.pdf?src-supplier=Newark, ComponentLink1URL=https://datasheet.ciiva.com/7271/irf540n-7271923.pdf?src-supplier=Newark, Drain to Source Voltage (Vdss)=100V, Dual Supply Voltage=100V, Element Configuration=Single, Fall Time=35ns, Height=15.24mm, Lead Free="Lead Free", Lead Pitch=2.54mm, Length=10.54mm, Manufacturer Part Number=IRF540NPBF, Mount="Through Hole", Nominal Vgs=4V, Number of Elements=1, Number of Pins=3, On-State Resistance=44MR, Packaging=Rail/Tube, Polarization=N, Power Dissipation=130W, Radiation Hardening=No, Rds On Max=44mR, REACH SVHC="No SVHC", Recovery Time=170ns, Rise Time=35ns, RoHS=Yes, RoHS Compliant=Yes, Series=HEXFET®, Supplier 1=Digi-Key, Supplier Part Number 1=IRF540NPBF, Termination="Through Hole", Turn-Off Delay Time=39ns, Turn-On Delay Time=11ns, Voltage Rating (DC)=100V, Width=0.185inch
Q2: library part BC547B, "Trans GP BJT NPN 45V 0.1A 500mW Automotive 3-Pin TO-92 Ammo", Case/Package=TO-92, Collector Base Voltage (VCBO)=50V, Collector Emitter Breakdown Voltage=45V, Collector Emitter Saturation Voltage=300mV, Current Rating=100mA, Emitter Base Voltage (VEBO)=6V, Frequency=300MHz, Manufacturer="ON Semiconductor / Fairchild", Max Operating Temperature=150°C, Max Power Dissipation=500mW, Min Operating Temperature=-65°C, Package Quantity=2000, Supplier Part Number 1=BC547BFS, Voltage=40V, Category=BJTs, Collector Emitter Voltage (VCEO)=45V, ComponentLink1Description=https://datasheet.ciiva.com/17011/bc547-17011404.pdf?src-supplier=Future+Electronics, ComponentLink1URL=https://datasheet.ciiva.com/17011/bc547-17011404.pdf?src-supplier=Future+Electronics, ComponentLink2Description=https://datasheet.ciiva.com/985/bc546-547-548rev5-985523.pdf?src-supplier=Digi-Key, ComponentLink2URL=https://datasheet.ciiva.com/985/bc546-547-548rev5-985523.pdf?src-supplier=Digi-Key, ComponentLink3Description=https://datasheet.ciiva.com/972/bc546-972262.pdf?src-supplier=Digi-Key, ComponentLink3URL=https://datasheet.ciiva.com/972/bc546-972262.pdf?src-supplier=Digi-Key, ComponentLink4Description=https://datasheet.ciiva.com/1195/1868820-1195464.pdf?src-supplier=Element14, ComponentLink4URL=https://datasheet.ciiva.com/1195/1868820-1195464.pdf?src-supplier=Element14, ComponentLink5Description=https://datasheet.ciiva.com/11197/bc550-11197769.pdf?src-supplier=Avnet, ComponentLink5URL=https://datasheet.ciiva.com/11197/bc550-11197769.pdf?src-supplier=Avnet, Contact Plating=Copper,Tin,Silver, Element Configuration=Single, Gain Bandwidth Product=100MHz, Height=4.58mm, hFE Min=200, Lead Free="Lead Free", Length=4.58mm, Manufacturer Part Number=BC547B, Max Breakdown Voltage=45V, Max Collector Current=100mA, Max Frequency=300MHz, Mount="Through Hole", Number of Elements=1, Number of Pins=3, Packaging=Bulk, Polarity=NPN, Power Dissipation=500mW, Pricing 1="1=0.50000, 10=0.36900, 100=0.20890, 500=0.13832, 1000=0.10605, 2000=0.09222, 5000=0.08300, 10000=0.07613 (USD)", Radiation Hardening=No, REACH SVHC="No SVHC", RoHS=Yes, Stock 1=7180, Supplier 1=Digi-Key, Transition Frequency=300MHz, Voltage Rating (DC)=45V, Weight=0.007055oz, Width=3.86mm
R1 R7 R8 R14: library part CFM12JT330R, "Res Carbon Film 330 Ohm 5% 1/2W -400ppm/°C to 0ppm/°C Conformal AXL Thru-Hole T/R", Case/Package=Axial, Manufacturer="Stackpole Electronics", Max Operating Temperature=155°C, Max Power Dissipation=500mW, Min Operating Temperature=-55°C, Resistance=330R, Resistor Type="Carbon Film", Supplier Part Number 1=330, Temperature Coefficient=-400ppm/°C, Tolerance=5%, Category="Through-Hole Resistors", ComponentLink1Description=https://www.seielect.com/Catalog/SEI-CF_CFM.pdf?src-supplier=Digi-Key, ComponentLink1URL=https://www.seielect.com/Catalog/SEI-CF_CFM.pdf?src-supplier=Digi-Key, ComponentLink2Description=https://www.seielect.com/catalog/SEI-Packaging.pdf?src-supplier=Digi-Key, ComponentLink2URL=https://www.seielect.com/catalog/SEI-Packaging.pdf?src-supplier=Digi-Key, ComponentLink3Description=https://www.seielect.com/catalog/SEI-CF_CFM.pdf?src-supplier=Avnet, ComponentLink3URL=https://www.seielect.com/catalog/SEI-CF_CFM.pdf?src-supplier=Avnet, Contact Plating=Tin,Matte, Diameter=2.3mm, Features="Flame Retardant Coating", Lead Free="Lead Free", Length=0.256inch, Manufacturer Part Number=CFM12JT330R, Mount="Through Hole,Axial", Number of Terminations=2, Packaging="Tape and Reel", Pricing 1="1=0.10000, 10=0.06700, 25=0.04880, 50=0.03720, 100=0.02740, 250=0.02092, 500=0.01672, 1000=0.01231 (USD)", Radiation Hardening=No, RoHS=Yes, RoHS Compliant=Yes, Series=CFM, Stock 1=145485, Supplier 1=Digi-Key
R2 R3 R4 R6 R9 R10 R11 R13 R15: library part CF14JT10K0, "Res Carbon Film 10K Ohm 5% 0.25W(1/4W) -500ppm/", Case/Package=Conformal, Manufacturer="Stackpole Electronics", Max Operating Temperature=155°C, Max Power Dissipation=250mW, Min Operating Temperature=-55°C, Package Quantity=1, Resistance=10kR, Resistor Type="Carbon Film", Supplier Part Number 1=10k, Temperature Coefficient=-500ppm/°C, Tolerance=5%, Category="Through-Hole Resistors", ComponentLink1Description=http://components.arrow.com/part/dataview/27619991S9848636N1174?src-supplier=Arrow+Electronics, ComponentLink1URL=http://components.arrow.com/part/dataview/27619991S9848636N1174?src-supplier=Arrow+Electronics, ComponentLink2Description=https://www.verical.com/server-webapp/html/getDatasheet?partID=367360&src-supplier=Verical, ComponentLink2URL=https://www.verical.com/server-webapp/html/getDatasheet?partID=367360&src-supplier=Verical, ComponentLink3Description=https://www.seielect.com/catalog/SEI-CF_CFM.pdf?src-supplier=Avnet, ComponentLink3URL=https://www.seielect.com/catalog/SEI-CF_CFM.pdf?src-supplier=Avnet, ComponentLink4Description=http://www.seielect.com/Catalog/SEI-CF_CFM.pdf?src-supplier=Future+Electronics, ComponentLink4URL=http://www.seielect.com/Catalog/SEI-CF_CFM.pdf?src-supplier=Future+Electronics, ComponentLink5Description=https://www.seielect.com/catalog/SEI-Packaging.pdf?src-supplier=Digi-Key, ComponentLink5URL=https://www.seielect.com/catalog/SEI-Packaging.pdf?src-supplier=Digi-Key, Construction=Cylindrical, Contact Plating=Tin,Matte, Diameter=2.3mm, Features="Flame Retardant Coating", Lead Free="Lead Free", Length=6.5mm, Manufacturer Part Number=CF14JT10K0, Military Standard=Not, Mount="Through Hole,Axial", Number of Terminations=2, Packaging="Tape and Reel", Power Rating=250mW, Pricing 1="1=0.10000, 10=0.05600, 25=0.04040, 50=0.03080, 100=0.02260, 250=0.01728, 500=0.01382, 1000=0.01017 (USD)", Radiation Hardening=No, RoHS=Yes, RoHS Compliant=Yes, Series=CF, Stock 1=658665, Supplier 1=Digi-Key, Termination=Axial
R5 R12: library part CF14JT1K00, "Res Carbon Film 1K Ohm 5% 1/4W -400ppm/°C to 0ppm/°C Conformal AXL Thru-Hole T/R", Case/Package=Conformal, Manufacturer="Stackpole Electronics", Max Operating Temperature=155°C, Max Power Dissipation=250mW, Min Operating Temperature=-55°C, Package Quantity=1, Resistance=1kR, Resistor Type="Carbon Film", Supplier Part Number 1=1k, Temperature Coefficient=-400ppm/°C, Tolerance=5%, Category="Through-Hole Resistors", ComponentLink1Description=http://components.arrow.com/part/dataview/27620077S9848643N1174?src-supplier=Arrow+Electronics, ComponentLink1URL=http://components.arrow.com/part/dataview/27620077S9848643N1174?src-supplier=Arrow+Electronics, ComponentLink2Description=http://www.seielect.com/Catalog/SEI-CF_CFM.pdf?src-supplier=Future+Electronics, ComponentLink2URL=http://www.seielect.com/Catalog/SEI-CF_CFM.pdf?src-supplier=Future+Electronics, ComponentLink3Description=https://www.seielect.com/catalog/SEI-CF_CFM.pdf?src-supplier=Avnet, ComponentLink3URL=https://www.seielect.com/catalog/SEI-CF_CFM.pdf?src-supplier=Avnet, ComponentLink4Description=https://www.seielect.com/catalog/SEI-Packaging.pdf?src-supplier=Digi-Key, ComponentLink4URL=https://www.seielect.com/catalog/SEI-Packaging.pdf?src-supplier=Digi-Key, ComponentLink5Description=https://www.seielect.com/Catalog/SEI-CF_CFM.pdf?src-supplier=Digi-Key, ComponentLink5URL=https://www.seielect.com/Catalog/SEI-CF_CFM.pdf?src-supplier=Digi-Key, ComponentLink6Description=https://www.verical.com/server-webapp/html/getDatasheet?partID=360403&src-supplier=Verical, ComponentLink6URL=https://www.verical.com/server-webapp/html/getDatasheet?partID=360403&src-supplier=Verical, Construction=Cylindrical, Contact Plating=Tin,Matte, Diameter=2.3mm, Features="Flame Retardant Coating", Lead Free="Lead Free", Length=6.5mm, Manufacturer Part Number=CF14JT1K00, Military Standard=Not, Mount="Through Hole,Axial", Number of Terminations=2, Packaging="Tape and Reel", Power Rating=250mW, Pricing 1="1=0.10000, 10=0.05600, 25=0.04040, 50=0.03080, 100=0.02260, 250=0.01728, 500=0.01382, 1000=0.01017 (USD)", Radiation Hardening=No, RoHS=Yes, RoHS Compliant=Yes, Series=CF, Stock 1=1034267, Supplier 1=Digi-Key, Termination=Axial
S1: library part TL1105BF160Q, "Switch Tactile N.O. SPST Round Button PC Pins 0.05A 50VDC 1.57N Thru-Hole", Manufacturer=E-Switch, Supplier Part Number 1="TACKILE SWITCH", Category="Tactile Switches", ComponentLink1Description=https://datasheet.ciiva.com/16156/p010003-16156249.pdf?src-supplier=Onlinecomponents.com, ComponentLink1URL=https://datasheet.ciiva.com/16156/p010003-16156249.pdf?src-supplier=Onlinecomponents.com, ComponentLink2Description=https://datasheet.ciiva.com/2900/p010003-2900804.pdf?src-supplier=Digi-Key, ComponentLink2URL=https://datasheet.ciiva.com/2900/p010003-2900804.pdf?src-supplier=Digi-Key, ComponentLink3Description=https://datasheet.ciiva.com/7637/tl1105-7637643.pdf?src-supplier=Element14, ComponentLink3URL=https://datasheet.ciiva.com/7637/tl1105-7637643.pdf?src-supplier=Element14, Manufacturer Part Number=TL1105BF160Q, Pricing 1="1=0.20000, 10=0.19300, 25=0.18320, 100=0.16660, 250=0.15664, 500=0.14332, 1000=0.11999, 2500=0.11666, 5000=0.10999 (USD)", RoHS=Yes, Stock 1=1174, Supplier 1=Digi-Key
U1: library part ATMEGA328P-PU, "ATMEGA328P-PU", Case/Package=PDIP, Frequency=20MHz, Manufacturer="Microchip / Atmel", Max Operating Temperature=85°C, Max Supply Voltage=5.5V, Min Operating Temperature=-40°C, Min Supply Voltage=1.8V, Package Quantity=14, Category=Microcontrollers, ComponentLink1Description=https://datasheet.ciiva.com/1157/1684409-1157696.pdf?src-supplier=Element14, ComponentLink1URL=https://datasheet.ciiva.com/1157/1684409-1157696.pdf?src-supplier=Element14, ComponentLink2Description=https://datasheet.ciiva.com/19457/2139111-19457070.pdf?src-supplier=Jameco, ComponentLink2URL=https://datasheet.ciiva.com/19457/2139111-19457070.pdf?src-supplier=Jameco, ComponentLink3Description=https://datasheet.ciiva.com/29119/155197-da-01-en-microcontr-atmega328p-pu-8bit-pdip-28-29119593.pdf?src-supplier=Conrad, ComponentLink3URL=https://datasheet.ciiva.com/29119/155197-da-01-en-microcontr-atmega328p-pu-8bit-pdip-28-29119593.pdf?src-supplier=Conrad, ComponentLink4Description=https://datasheet.ciiva.com/15213/getdatasheetpartid-318533-15213133.pdf?src-supplier=Verical, ComponentLink4URL=https://datasheet.ciiva.com/15213/getdatasheetpartid-318533-15213133.pdf?src-supplier=Verical, Contact Plating=Tin,Matte, Core Architecture=AVR, Data Bus Width=8b, Height=3.28mm, Interface=I2C,SPI,UART,USART,2-Wire, Lead Free="Lead Free", Length=37.4mm, Manufacturer Part Number=ATMEGA328P-PU, Max Frequency=20MHz, Memory Size=32KB, Memory Type=FLASH, Mount="Through Hole", Number of ADC Channels=6, Number of I2C Channels=1, Number of I/Os=23, Number of Pins=28, Number of Programmable I/O=23, Number of PWM Channels=6, Number of SPI Channels=1, Number of Timers/Counters=3, Oscillator Type=Internal, Packaging=Rail/Tube, Peripherals="Brown-out Detect/Reset,POR,PWM,WDT", Radiation Hardening=No, RAM Size=2KB, REACH SVHC="No SVHC", RoHS=Yes, RoHS Compliant=Yes, Series="AVR® ATmega", Supplier 1=Digi-Key, Supplier Part Number 1=ATMEGA328P-PU, Watchdog Timer=Yes, Width=6.76mm
VR1 VR2: "LM78XX Series 5 V Fixed Output 1 A 3-Terminal LDO Voltage Regulator - TO-220", Case/Package=TO-220-3, Current Rating=1A, Dropout Voltage=2V, Manufacturer="ON Semiconductor / Fairchild", Max Input Voltage=35V, Max Operating Temperature=125°C, Max Output Voltage=5.2V, Min Input Voltage=7V, Min Operating Temperature=-40°C, Min Output Voltage=5V, Output Voltage Accuracy=4%, Package Quantity=50, Power Supply Rejection Ratio (PSRR)=73dB, Quiescent Current=8mA, Accuracy=4%, Category="Voltage Regulators - Linear", ComponentLink1Description=https://datasheet.ciiva.com/19456/786138-19456361.pdf?src-supplier=Jameco, ComponentLink1URL=https://datasheet.ciiva.com/19456/786138-19456361.pdf?src-supplier=Jameco, ComponentLink2Description=https://datasheet.ciiva.com/1512/1855686-1512105.pdf?src-supplier=Element14, ComponentLink2URL=https://datasheet.ciiva.com/1512/1855686-1512105.pdf?src-supplier=Element14, ComponentLink3Description=https://datasheet.ciiva.com/1512/1855686-1512106.pdf?src-supplier=Element14, ComponentLink3URL=https://datasheet.ciiva.com/1512/1855686-1512106.pdf?src-supplier=Element14, ComponentLink4Description=https://datasheet.ciiva.com/1511/1855686-1511835.pdf?src-supplier=Element14, ComponentLink4URL=https://datasheet.ciiva.com/1511/1855686-1511835.pdf?src-supplier=Element14, ComponentLink5Description=https://datasheet.ciiva.com/8239/lm7812-8239478.pdf?src-supplier=Avnet, ComponentLink5URL=https://datasheet.ciiva.com/8239/lm7812-8239478.pdf?src-supplier=Avnet, ComponentLink6Description=https://datasheet.ciiva.com/17332/lm7805-17332792.pdf?src-supplier=Future+Electronics, ComponentLink6URL=https://datasheet.ciiva.com/17332/lm7805-17332792.pdf?src-supplier=Future+Electronics, ComponentLink7Description=https://datasheet.ciiva.com/2039/lm7805-2039365.pdf?src-supplier=Digi-Key, ComponentLink7URL=https://datasheet.ciiva.com/2039/lm7805-2039365.pdf?src-supplier=Digi-Key, ComponentLink8Description=https://datasheet.ciiva.com/48694/001253095-da-01-en-ic-reg-ldo-5v-1a-lm7805ct-to-220-3-fsc-48694790.pdf?src-supplier=Conrad, ComponentLink8URL=https://datasheet.ciiva.com/48694/001253095-da-01-en-ic-reg-ldo-5v-1a-lm7805ct-to-220-3-fsc-48694790.pdf?src-supplier=Conrad, Height=16.3mm, Lead Free="Lead Free", Length=10.67mm, Manufacturer Part Number=LM7805CT, Max Output Current=1A, Mount="Through Hole", Nominal Output Voltage=5V, Number of Outputs=1, Number of Pins=3, Number of Regulators=1, Output Current=1A, Output Type=Fixed, Output Voltage=5V, Packaging=Rail/Tube, Polarity=Positive, Radiation Hardening=No, REACH SVHC="No SVHC", RoHS=Yes, RoHS Compliant=Yes, Supplier 1=Digi-Key, Supplier Part Number 1=LM7805CT, Weight=1.214g, Width=4.7mm
XTAL1: library part ATS16A-E, "Crystal 16MHz ±30ppm (Tol) ±50ppm (Stability) 20pF FUND 40Ohm 2-Pin HC-49/US Thru-Hole Bulk", ESR (Equivalent Series Resistance)=40R, Frequency=16MHz, Frequency Stability=50ppm, Frequency Tolerance=30ppm, Load Capacitance=20pF, Manufacturer=CTS, Max Operating Temperature=85°C, Min Operating Temperature=-40°C, Package Quantity=100, Category=Crystals, ComponentLink1Description=https://datasheet.ciiva.com/4945/008-0309-0-32667-4945375.pdf?src-supplier=Mouser, ComponentLink1URL=https://datasheet.ciiva.com/4945/008-0309-0-32667-4945375.pdf?src-supplier=Mouser, ComponentLink2Description=https://datasheet.ciiva.com/861/008-0309-0-861523.pdf?src-supplier=Digi-Key, ComponentLink2URL=https://datasheet.ciiva.com/861/008-0309-0-861523.pdf?src-supplier=Digi-Key, ComponentLink3Description=https://datasheet.ciiva.com/3176/008-0309-0-3176501.pdf?src-supplier=Avnet, ComponentLink3URL=https://datasheet.ciiva.com/3176/008-0309-0-3176501.pdf?src-supplier=Avnet, Contact Plating=Copper,Tin,Silver, Height=0.145inch, Lead Free="Lead Free", Length=0.427inch, Manufacturer Part Number=ATS16A-E, Mount="Through Hole", Packaging=Bulk, Pricing 1="1=0.36000, 10=0.30300, 50=0.27280, 100=0.24240, 500=0.23028, 1000=0.19392, 2500=0.18180, 5000=0.17574, 10000=0.16968 (USD)", RoHS=Yes, Stock 1=1809, Supplier 1=Digi-Key, Supplier Part Number 1=16MHz, Termination=Radial, Tolerance=30ppm, Width=0.177inch

## Nets (pads, with @x,y where several pads share a name; then routed paths per layer and width w, separated by ;. In a path a pad name is that pad's centre, name@x,y a point inside that pad or via, vN(x,y) a via of type N, cw(c..) or ccw(c..) an arc to the next point about the centre after c; other vN are vias at no path point)
+5: C3.1 C4.1 C8.1 D3.K D7.K JP4.2 LS1.1 R1.1 R4.2 R8.1 R13.2 R14.2 U1.7 U1.20 VR1.3 VR2.3
+12: C1.1 C2.2 D4.K JP1.1 JP2.1 R2.2 R3.1 VR1.1 VR2.1
BUZZER: R12.1 U1.18
COL_1: JP3.1 R9.2 U1.11
COL_2: JP3.2 R10.2 U1.12
COL_3: JP3.3 R11.2 U1.13
D4: JP4.11 U1.23
D5: JP4.12 U1.24
D6: JP4.13 U1.25
D7: JP4.14 U1.26
EN: JP4.6 U1.4
GND: C1.2 C2.1 C3.2 C4.2 C5.2 C6.2 C7.2 C8.2 C9.2 D1.K D2.K D6.K JP2.2 JP2.3 JP4.1 JP4.5 JP4.16 Q1.3 Q2.3 R6.1 R9.1 R10.1 R11.1 R15.1 S1.1 S1.2 U1.8 U1.22 VR1.2 VR2.2
NetC5_1: C5.1 D3.A R4.1 S1.3 S1.4 U1.1
NetC6_1: C6.1 U1.9 XTAL1.2
NetC7_1: C7.1 U1.10 XTAL1.1
NetC9_1: C9.1 U1.21
NetD1_A: D1.A R1.2
NetD2_A: D2.A R2.1
NetD4_A: D4.A D5.K JP1.2 Q1.2
NetD5_A: D5.A R3.2
NetD6_A: D6.A R7.2
NetD7_A: D7.A D8.K LS1.2 Q2.1
NetD8_A: D8.A R8.2
NetJP4_3: JP4.3 R13.1 R15.2
NetJP4_15: JP4.15 R14.1
NetQ1_1: Q1.1 R5.2 R6.2
NetQ2_2: Q2.2 R12.2
NetR7_1: R7.1 U1.19
RE: JP4.4 U1.6
ROW_1: JP3.4 U1.14
ROW_2: JP3.5 U1.15
ROW_3: JP3.6 U1.16
ROW_4: JP3.7 U1.17
SOIL_SENSOR: U1.27
SOLENOID: R5.1 U1.5
pads on no net: JP4.7 JP4.8 JP4.9 JP4.10 JP5.1 JP5.2 JP5.3 U1.2 U1.3 U1.28

## Text inside footprints (layer, text, board x,y; h text height)
LS1: Top Assembly "(-)" at 236.617,15.257 h2; Top Assembly "(+)" at 228.86,15.257 h2; Top Overlay "(-)" at 236.617,15.257 h2; Top Overlay "(+)" at 228.86,15.257 h2